# EAGLE board InkTime_pcb (EAGLE 9.7.0)
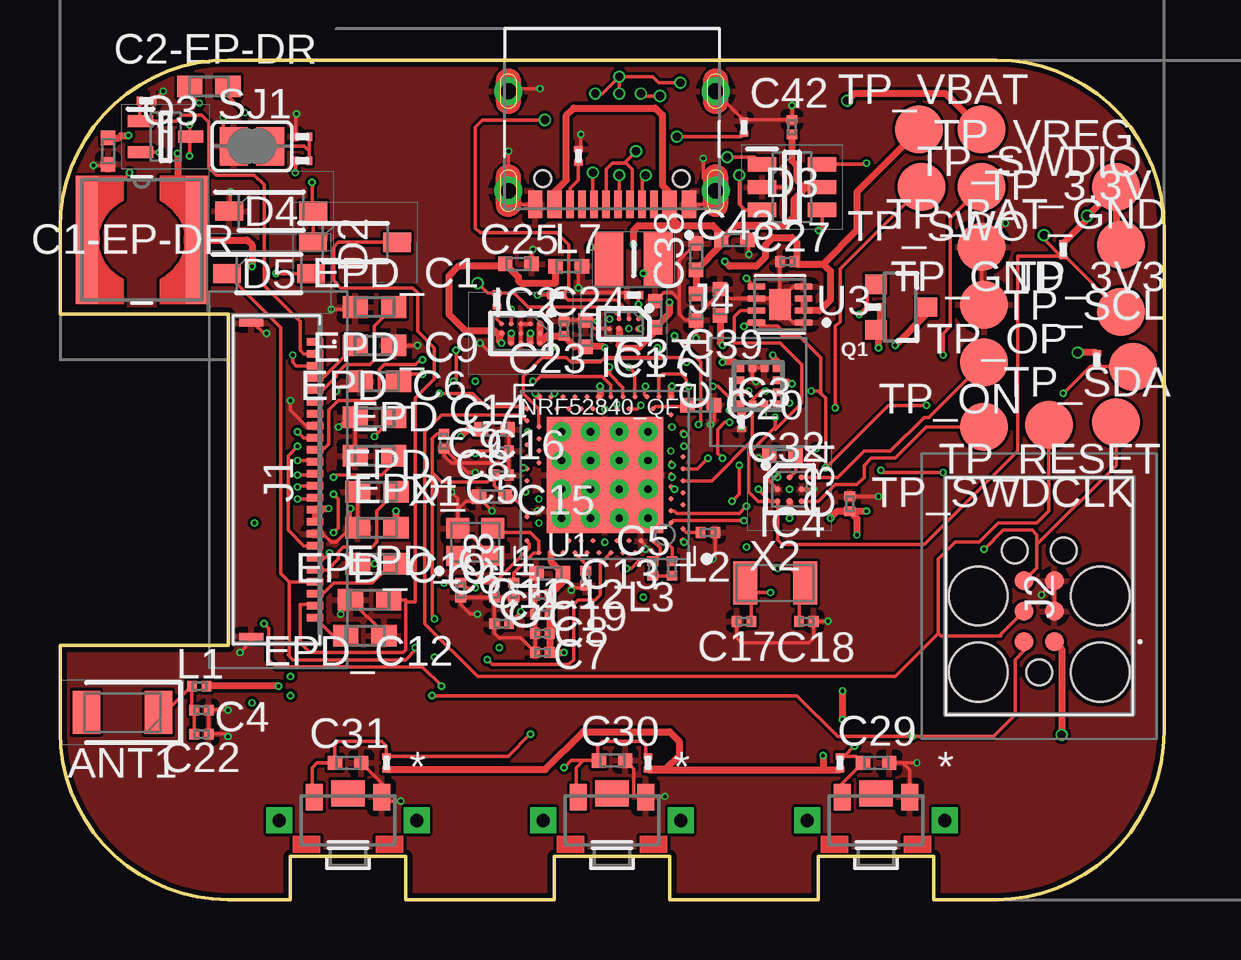
[diagram p0: board, top side]
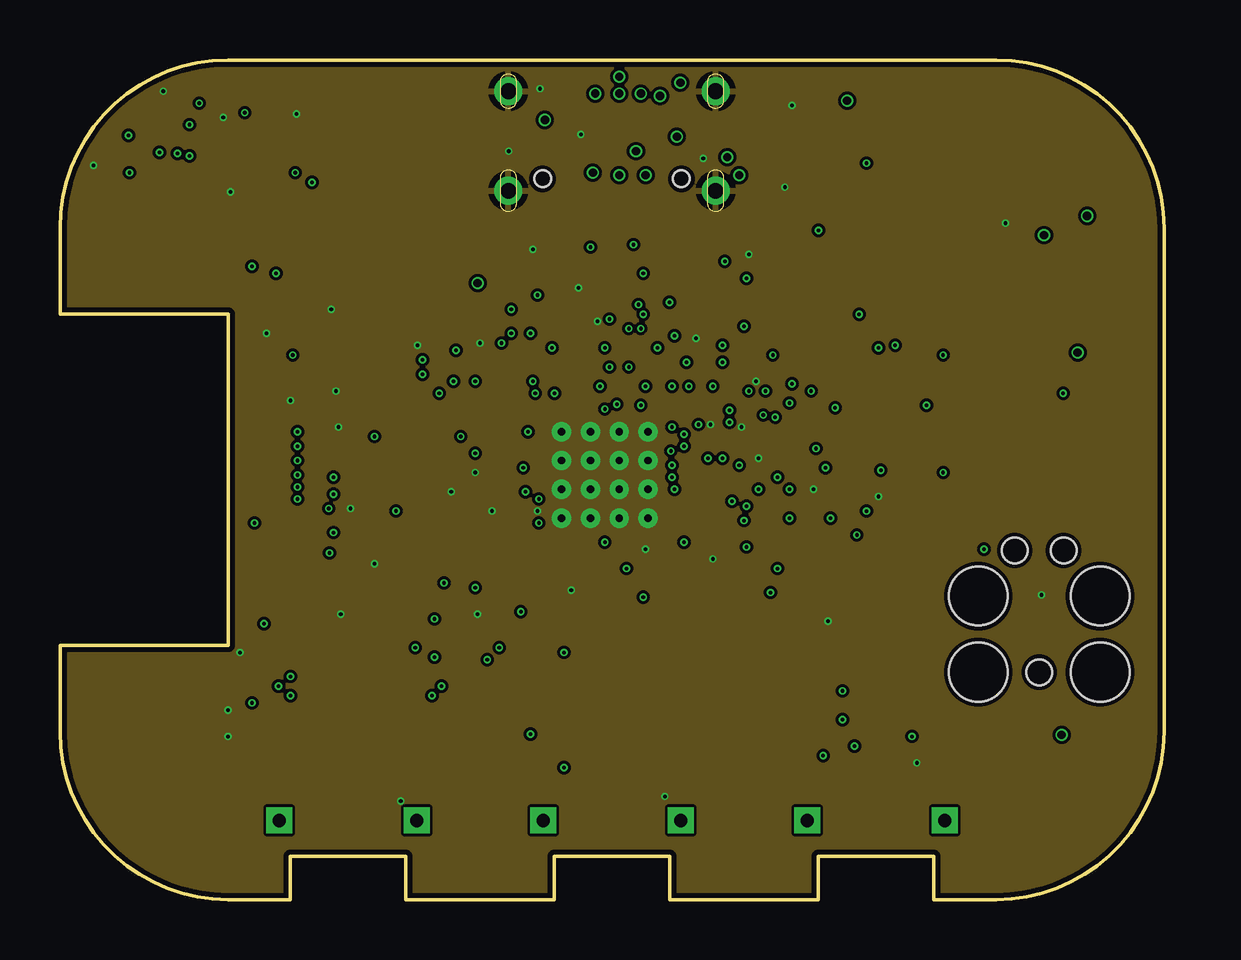
[diagram p1: board, inner layer Route2]
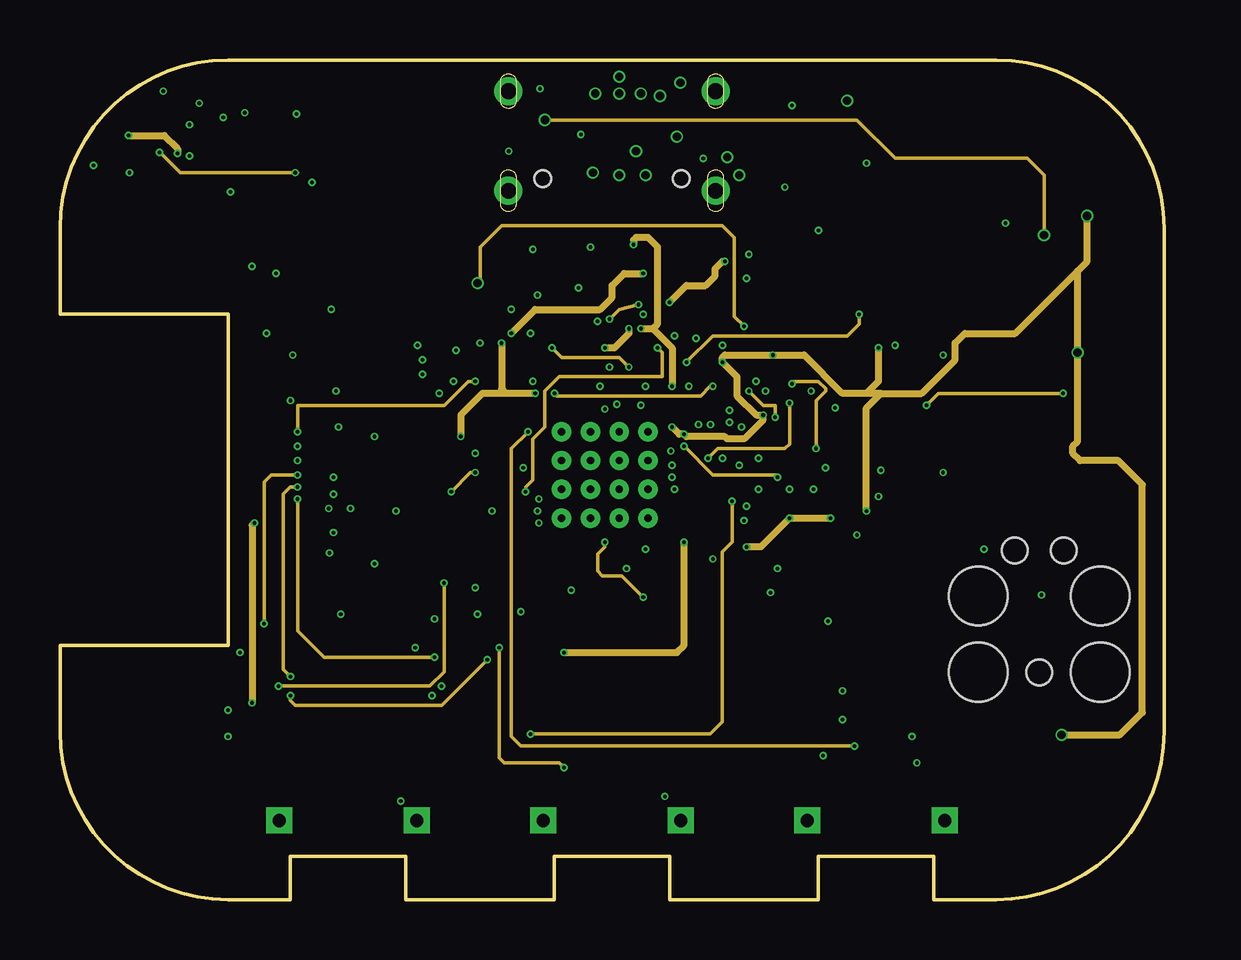
[diagram p2: board, inner layer Route15]
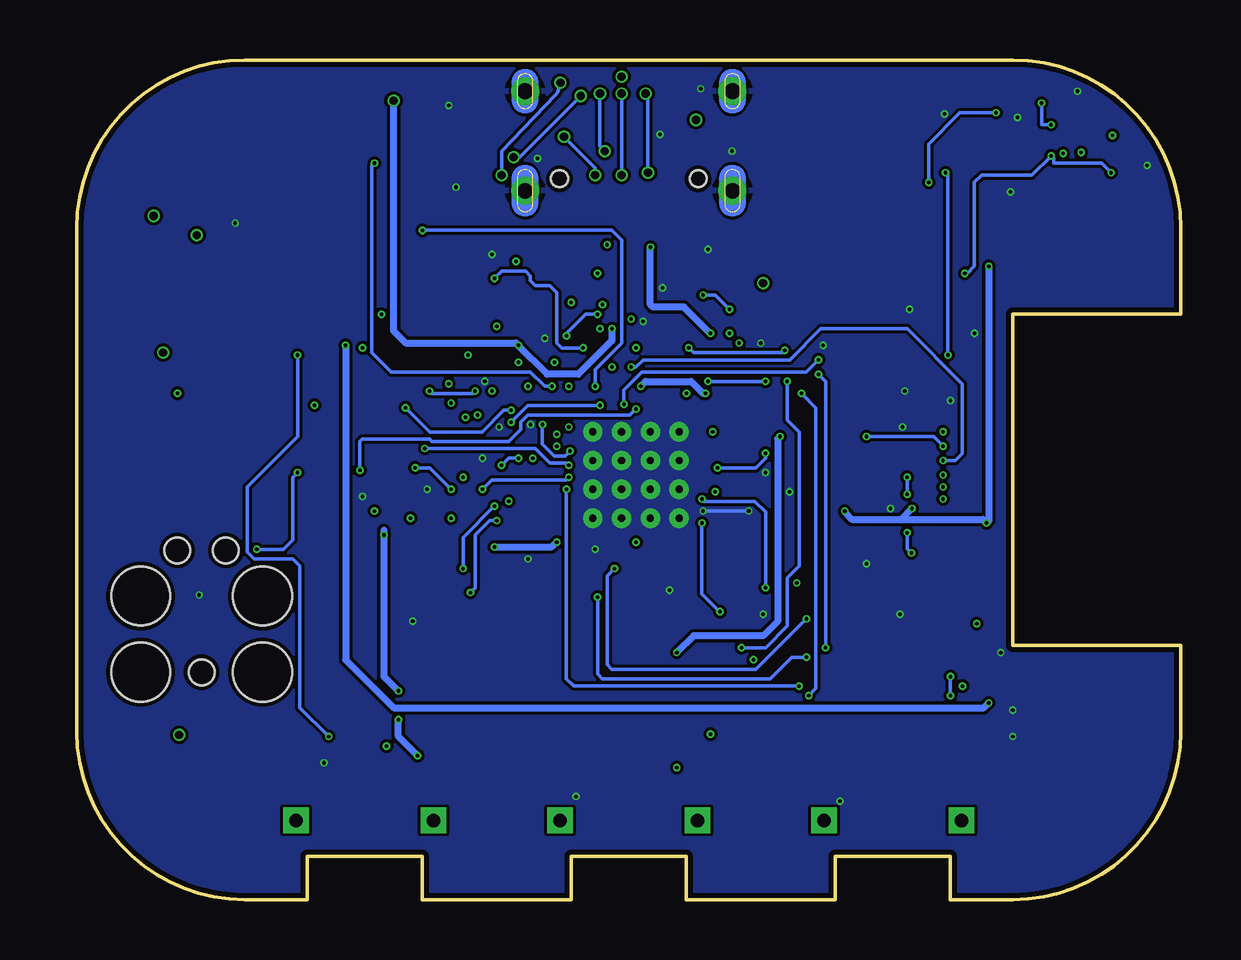
[diagram p3: board, bottom side, seen from below]

Size 46 x 35 mm. Coordinates in mm from the lower left corner, seen from the top.
Outline: 39,0 36.4,0 36.4,1.8 31.6,1.8 31.6,0 25.4,0 25.4,1.8 20.6,1.8 20.6,0 14.4,0 14.4,1.8 9.6,1.8 9.6,0 7,0 arc-90 0,7 0,10.6 7,10.6 7,24.4 0,24.4 0,28 arc-90 7,35 39,35 arc-90 46,28 46,7 arc-90 39,0
Copper layers (1+2*15+16): Top 0.035mm / dielectric 1.6mm / Route2 0.035mm / dielectric 0.15mm / Route15 0.035mm / dielectric 0.2mm / Bottom 0.035mm
Design rules "jlcpcb-2layers *": minimum track width 5mil, minimum drill 0.15mm, track to track 5mil, track to pad 5mil, pad to pad 5mil, via to via 5mil, smd to smd 5mil, copper to edge 0.2mm, drill to drill 6mil, minimum pad ring 10mil, minimum via ring 3mil, stop-mask expansion 4mil, vias tented up to drill 0mil, thermal gap 10mil

## Footprints (pad centres in the part's own frame; a part is rotated, then mirrored left to right if it is on the bottom)
2450AT18B100E_ANTC3216X140N = smd 1.15 x 1.8: 1 -1.5,0; 2 1.5,0
NORDIC_NRF_3_RESC0201_N = smd 0.4 x 0.45: 1 -0.305,0; 2 0.305,0
NORDIC_NRF_3_RESC0402_N = smd 0.6 x 0.6: 1 -0.55,0; 2 0.55,0
NORDIC_NRF_3_RESC0603_N = smd 1.05 x 0.9: 1 -0.8,0; 2 0.8,0
ESP32_C6_LIBRARY_5_SOD3716X135N = smd 1.15 x 0.8: 1 -1.75,0; 2 1.75,0
ESP32_C6_LIBRARY_3_SOT95P280X145-6N = smd 1.2 x 0.6: 1 -1.25,0.95; 2 -1.25,0; 3 -1.25,-0.95; 4 1.25,-0.95; 5 1.25,0; 6 1.25,0.95
BQ25180YBGR_BGA8C40P2X4_100X155X50 = smd 0.2 x 0.2: A1 -0.2,0.6; A2 0.2,0.6; B1 -0.2,0.2; B2 0.2,0.2; C1 -0.2,-0.2; C2 0.2,-0.2; D1 -0.2,-0.6; D2 0.2,-0.6
RT6160AWSC_BGA15C40P3X5_140X230X60 = smd 0.216 x 0.216: A1 -0.4,0.8; A2 0,0.8; A3 0.4,0.8; B1 -0.4,0.4; B2 0,0.4; B3 0.4,0.4; C1 -0.4,0; C2 0,0; C3 0.4,0; D1 -0.4,-0.4; D2 0,-0.4; D3 0.4,-0.4; E1 -0.4,-0.8; E2 0,-0.8; E3 0.4,-0.8
BMA423_BMA423 = smd 0.3 x 0.35: 1 -0.75,-0.775; 2 -0.25,-0.775; 3 0.25,-0.775; 4 0.75,-0.775; 7 0.75,0.775; 8 0.25,0.775; 9 -0.25,0.775; 10 -0.75,0.775 | smd 0.35 x 0.3: 5 0.775,-0.25; 6 0.775,0.25; 11 -0.775,0.25; 12 -0.775,-0.25
DRV2605YZFR_BGA9C50P3X3_144X144X62 = smd 0.25 x 0.25: A1 -0.5,0.5; A2 0,0.5; A3 0.5,0.5; B1 -0.5,0; B2 0,0; B3 0.5,0; C1 -0.5,-0.5; C2 0,-0.5; C3 0.5,-0.5
503480-2400_5034802400 = smd 0.3 x 0.7: 1 -5.75,1.525; 2 -5.25,1.525; 3 -4.75,1.525; 4 -4.25,1.525; 5 -3.75,1.525; 6 -3.25,1.525; 7 -2.75,1.525; 8 -2.25,1.525; 9 -1.75,1.525; 10 -1.25,1.525; 11 -0.75,1.525; 12 -0.25,1.525; 13 0.25,1.525; 14 0.75,1.525; 15 1.25,1.525; 16 1.75,1.525; 17 2.25,1.525; 18 2.75,1.525; 19 3.25,1.525; 20 3.75,1.525; 21 4.25,1.525; 22 4.75,1.525; 23 5.25,1.525; 24 5.75,1.525 | smd 0.3 x 1: MP1 -6.54,-1.125; MP2 6.54,-1.125
TC2030-IDC_TC2030IDC = smd 0.783 x 0.783: 1 -0.953,-0.635; 2 -0.953,0.635; 3 0.317,-0.635; 4 0.317,0.635; 5 1.588,-0.635; 6 1.588,0.635 | hole 2.451: -2.223,-2.54; -2.223,2.54; 0.952,-2.54; 0.952,2.54 | hole 1.067: -2.223,0; 2.857,-1.016; 2.857,1.016
KH-TYPE-C-16P_KINGHELM_KH-TYPE-C-16P = smd 0.6 x 1.15: A1_B12 -3.2,4.725; A4_B9 -2.4,4.725; A9_B4 2.4,4.725; A12_B1 3.2,4.725 | smd 0.3 x 1.15: A5 -1.25,4.725; A6 -0.25,4.725; A7 0.25,4.725; A8 1.25,4.725; B5 1.75,4.725; B6 0.75,4.725; B7 -0.75,4.725; B8 -1.75,4.725 | drill 0.65 pad 1.05: SH1 -4.32,0; SH2 4.32,0; SH3 -4.32,4.15; SH4 4.32,4.15 | hole 0.7: -2.89,3.65; 2.89,3.65
NORDIC_NRF_2_RESC0201_N = smd 0.4 x 0.45: 1 -0.305,0; 2 0.305,0
ESP32_C6_LIBRARY_2_IND_4828-WE-TPC_WRE = smd 0.9 x 5.3: 1 -2.286,0; 2 2.286,0
MLP2016SR47MT0S1_INDC2016X100N = smd 1.2 x 2.2: 1 -1.028,0; 2 1.028,0
ESP32_C6_LIBRARY_4_ESP32_C6_LIBRARY_4_ESP32_C6_LIBRARY_4_ESP32_C6_LIBRARY_4_ESP32_WROVER_SPARKFUN-DISCRETESEMI_SOT23-3 = smd 0.8 x 0.9: 1 -0.95,-1; 2 0.95,-1; 3 0,1.1
ESP32_C6_LIBRARY_6_SOT65P210X110-3N = smd 1.05 x 0.5: 1 -1.05,0.65; 2 -1.05,-0.65; 3 1.05,0
ERA-1AEB3401C_0201 = smd 0.35 x 0.25: 1 0,0.275; 2 0,-0.275
CPF0201D7K68C1_0201 = smd 0.35 x 0.25: 1 0,0.275; 2 0,-0.275
ESP32_C6_LIBRARY_7_JUMPER_SJ = smd 1.168 x 1.6: 1 -0.762,0; 2 0.762,0
2025-10-22_07-23-44_LIBRARY_SW_EVP-AKE31A_PAN = smd 0.711 x 1.092: 1 -1.4,-0.972; 2 1.4,-0.972 | drill 0.559 pad 0.914 square: 3 -2.864,0; 4 2.864,0 | smd 1.397 x 1.092: 5 0,-1.124
HECTOR_WATCH_1_TP20R = smd 2 x 2: TP 0,0
NORDIC_NRF_4_AQFN50P700X700X85_HS-74N = smd 4.85 x 4.85: P$74 0,0 | drill 0.3 pad 0.6: P$75 -1.8,1.8; P$76 -0.6,1.8; P$77 0.6,1.8; P$78 1.8,1.8; P$79 -1.8,0.6; P$80 -0.6,0.6; P$81 0.6,0.6; P$82 1.8,0.6; P$83 -1.8,-0.6; P$84 -0.6,-0.6; P$85 0.6,-0.6; P$86 1.8,-0.6; P$87 -1.8,-1.8; P$88 -0.6,-1.8; P$89 0.6,-1.8; P$90 1.8,-1.8 | smd 0.2 x 0.2: P$A8 -1.25,3.25; P$A10 -0.75,3.25; P$A12 -0.25,3.25; P$A14 0.25,3.25; P$A16 0.75,3.25; P$A18 1.25,3.25; P$A20 1.75,3.25; P$A22 2.25,3.25; P$A23 2.75,3.25; P$AA24 3.25,-2.25; P$AB2 -2.75,-2.5; P$AC5 -2,-2.75; P$AC9 -1,-2.75; P$AC11 -0.5,-2.75; P$AC13 0,-2.75; P$AC15 0.5,-2.75; P$AC17 1,-2.75; P$AC19 1.5,-2.75; P$AC21 2,-2.75; P$AC24 3.25,-2.75; P$AD2 -2.75,-3.25; P$AD4 -2.25,-3.25; P$AD6 -1.75,-3.25; P$AD8 -1.25,-3.25; P$AD10 -0.75,-3.25; P$AD12 -0.25,-3.25; P$AD14 0.25,-3.25; P$AD16 0.75,-3.25; P$AD18 1.25,-3.25; P$AD20 1.75,-3.25; P$AD22 2.25,-3.25; P$AD23 2.75,-3.25; P$B1 -3.25,2.75; P$B3 -2.5,2.75; P$B5 -2,2.75; P$B7 -1.5,2.75; P$B9 -1,2.75; P$B11 -0.5,2.75; P$B13 0,2.75; P$B15 0.5,2.75; P$B17 1,2.75; P$B19 1.5,2.75; P$B24 3.25,2.75; P$C1 -3.25,2.25; P$D2 -2.75,2; P$D23 2.75,2; P$E24 3.25,1.75; P$F2 -2.75,1.5; P$F23 2.75,1.5; P$G1 -3.25,1.25; P$H2 -2.75,1; P$H23 2.75,1; P$J1 -3.25,0.75; P$J24 3.25,0.75; P$K2 -2.75,0.5; P$L1 -3.25,0.25; P$L24 3.25,0.25; P$M2 -2.75,0; P$N1 -3.25,-0.25; P$N24 3.25,-0.25; P$P2 -2.75,-0.5; P$P23 2.75,-0.5; P$R1 -3.25,-0.75; P$R24 3.25,-0.75; P$T2 -2.75,-1; P$T23 2.75,-1; P$U1 -3.25,-1.25; P$U24 3.25,-1.25; P$V23 2.75,-1.5; P$W1 -3.25,-1.75; P$W24 3.25,-1.75; P$Y2 -2.75,-2; P$Y23 2.75,-2
ESP32_C6_LIBRARY_SON50P200X200X80-9N = smd 0.76 x 0.27: 1 -0.985,0.75; 2 -0.985,0.25; 3 -0.985,-0.25; 4 -0.985,-0.75; 5 0.985,-0.75; 6 0.985,-0.25; 7 0.985,0.25; 8 0.985,0.75 | smd 0.9 x 1.3: 9 0,0
NORDIC_NRF_BT-XTAL_2016_N = smd 0.95 x 0.85: 1 -0.725,-0.575; 2 0.725,-0.575; 3 0.725,0.575; 4 -0.725,0.575
NORDIC_NRF_1_XTAL_3215_N = smd 1 x 1.8: 1 -1.25,0; 2 1.25,0

## Placement (x,y rotation side)
ANT1  2450AT18B100E  [2450AT18B100E_ANTC3216X140N]  2.6,7.8 180 top
C1  12pF  [NORDIC_NRF_3_RESC0201_N]  18.1,12.9 270 top
C1-EP-DR  10uF  [NORDIC_NRF_3_RESC0402_N]  2,31.2 270 top
C2  12pF  [NORDIC_NRF_3_RESC0201_N]  18.9,12.9 270 top
C2-EP-DR  4.7uF/25  [NORDIC_NRF_3_RESC0603_N]  6.2,33.9 180 top
C3  1pF  [NORDIC_NRF_3_RESC0201_N]  16.7,12.9 90 top
C4  1pF  [NORDIC_NRF_3_RESC0201_N]  5.9,7.9 180 top
C5  100nF  [NORDIC_NRF_3_RESC0201_N]  27,15.3 0 top
C6  4.7uF  [NORDIC_NRF_3_RESC0402_N]  20.4,13.6 180 top
C7  100nF  [NORDIC_NRF_3_RESC0201_N]  20.1,10.3 180 top
C8  100nF  [NORDIC_NRF_3_RESC0201_N]  20.1,11.1 0 top
C9  820pF  [NORDIC_NRF_3_RESC0201_N]  18.4,18.7 180 top
C10  N.C.  [NORDIC_NRF_3_RESC0201_N]  16,19.1 90 top
C11  100pF  [NORDIC_NRF_3_RESC0201_N]  18.4,11.5 0 top
C12  100nF  [NORDIC_NRF_3_RESC0201_N]  20.1,12.7 180 top
C13  N.C.  [NORDIC_NRF_3_RESC0201_N]  21.9,13.4 270 top
C14  4.7uF  [NORDIC_NRF_3_RESC0402_N]  18.1,19.6 0 top
C15  1.0uF  [NORDIC_NRF_3_RESC0402_N]  18,16.8 180 top
C16  47nF  [NORDIC_NRF_3_RESC0201_N]  18.4,17.7 0 top
C17  12pF  [NORDIC_NRF_3_RESC0201_N]  28.5,11.6 0 top
C18  12pF  [NORDIC_NRF_3_RESC0201_N]  31.1,11.6 180 top
C19  100nF  [NORDIC_NRF_3_RESC0201_N]  20.1,11.9 180 top
C20  4.7uF  [NORDIC_NRF_3_RESC0402_N]  26.7,20.6 0 top
C21  4.7uF  [NORDIC_NRF_3_RESC0402_N]  26.5,24.7 270 top
C22  N.C.  [NORDIC_NRF_3_RESC0201_N]  5.9,6.9 0 top
C23  0.1uF  [NORDIC_NRF_3_RESC0201_N]  21,23.8 270 top
C24  10uF  [NORDIC_NRF_3_RESC0402_N]  21.9,23.6 270 top
C25  22uF  [NORDIC_NRF_3_RESC0402_N]  19.1,26.5 0 top
C27  0.1uF  [NORDIC_NRF_3_RESC0201_N]  30.3,26.6 180 top
C29  1uF  [NORDIC_NRF_3_RESC0402_N]  34,5.7 0 top
C30  1uF  [NORDIC_NRF_3_RESC0402_N]  23,5.8 0 top
C31  1uF  [NORDIC_NRF_3_RESC0402_N]  12,5.7 0 top
C32  1uF  [NORDIC_NRF_3_RESC0402_N]  30.1,18.5 180 top
C33  22uF  [NORDIC_NRF_3_RESC0402_N]  21.2,26.4 0 top
C34  0.1uF  [NORDIC_NRF_3_RESC0201_N]  32.9,16.5 90 top
C37  1uF  [NORDIC_NRF_3_RESC0402_N]  24.8,24.4 90 top
C38  1uF  [NORDIC_NRF_3_RESC0402_N]  26.5,26.8 90 top
C39  10uF  [NORDIC_NRF_3_RESC0402_N]  27.5,24.9 90 top
C42  0.1uF  [NORDIC_NRF_3_RESC0201_N]  30.5,32.2 90 top
C43  4.7uF  [NORDIC_NRF_3_RESC0402_N]  28.1,27.5 0 top
D2  MBR0530  [ESP32_C6_LIBRARY_5_SOD3716X135N]  12.3,27.4 359.9 top
D3  USBLC6-2SC6Y  [ESP32_C6_LIBRARY_3_SOT95P280X145-6N]  30.5,29.7 0 top
D4  MBR0530  [ESP32_C6_LIBRARY_5_SOD3716X135N]  8.8,28.7 0 top
D5  MBR0530  [ESP32_C6_LIBRARY_5_SOD3716X135N]  8.7,26.1 0 top
EPD_C1  1uF/50V  [NORDIC_NRF_3_RESC0603_N]  13.1,24.7 0 top
EPD_C2  1uF/50V  [NORDIC_NRF_3_RESC0603_N]  13.1,23.1 180 top
EPD_C5  1uF/50V  [NORDIC_NRF_3_RESC0603_N]  13.2,15.5 0 top
EPD_C6  1uF/50V  [NORDIC_NRF_3_RESC0603_N]  13.1,20.1 0 top
EPD_C7  1uF/50V  [NORDIC_NRF_3_RESC0603_N]  13.1,18.5 0 top
EPD_C8  1uF/50V  [NORDIC_NRF_3_RESC0603_N]  13.2,17 0 top
EPD_C9  1uF/50V  [NORDIC_NRF_3_RESC0603_N]  13.3,21.6 0 top
EPD_C10  1uF/50V  [NORDIC_NRF_3_RESC0603_N]  13.2,14 0 top
EPD_C11  1uF/50V  [NORDIC_NRF_3_RESC0603_N]  12.9,12.5 0 top
EPD_C12  1uF/50V  [NORDIC_NRF_3_RESC0603_N]  12.7,11 180 top
IC1  BQ25180YBGR  [BQ25180YBGR_BGA8C40P2X4_100X155X50]  23.5,24 270 top
IC2  RT6160AWSC  [RT6160AWSC_BGA15C40P3X5_140X230X60]  19.2,23.6 270 top
IC3  BMA423  [BMA423_BMA423]  29.1,21.4 0 top
IC4  DRV2605YZFR  [DRV2605YZFR_BGA9C50P3X3_144X144X62]  30.4,17.1 0 top
J1  503480-2400  [503480-2400_5034802400]  9.1,17.5 270 top
J2  TC2030-IDC  [TC2030-IDC_TC2030IDC]  40.8,11.7 90 top
J4  KH-TYPE-C-16P  [KH-TYPE-C-16P_KINGHELM_KH-TYPE-C-16P]  23,33.7 180 top
L1  3.9nH  [NORDIC_NRF_2_RESC0201_N]  5.8,8.9 180 top
L2  10uH  [NORDIC_NRF_2_RESC0201_N]  25.5,13.8 270 top
L3  15nH  [NORDIC_NRF_2_RESC0201_N]  24.7,13.8 90 top
L5  68uH  [ESP32_C6_LIBRARY_2_IND_4828-WE-TPC_WRE]  3.4,27.5 0 top
L7  FTC252012SR47MBCA  [MLP2016SR47MT0S1_INDC2016X100N]  23.9,26.7 0 top
Q1  20V/4.2A/52mΩ/1.4W  [ESP32_C6_LIBRARY_4_ESP32_C6_LIBRARY_4_ESP32_C6_LIBRARY_4_ESP32_C6_LIBRARY_4_ESP32_WROVER_SPARKFUN-DISCRETESEMI_SOT23-3]  35,24.7 270 top
Q3  SI1308EDL-T1-GE3  [ESP32_C6_LIBRARY_6_SOT65P210X110-3N]  4.4,31.8 0 top
R1_EP_DR  0.47  [ERA-1AEB3401C_0201]  10.1,30.8 270 top
R1_USB  5K1  [CPF0201D7K68C1_0201]  28.5,32.2 0 top
R2  0  [CPF0201D7K68C1_0201]  18.2,25 0 top
R2_EP_DR  10K  [ERA-1AEB3401C_0201]  3.6,33.3 270 top
R2_USB  5K1  [CPF0201D7K68C1_0201]  21.6,31 180 top
R3  0  [ERA-1AEB3401C_0201]  28.4,19.9 180 top
R4  0  [CPF0201D7K68C1_0201]  20.7,25.2 270 top
R5  10K  [ERA-1AEB3401C_0201]  24.5,5.7 0 top
R7  10K  [ERA-1AEB3401C_0201]  32.5,5.7 0 top
R8  10K  [ERA-1AEB3401C_0201]  13.6,5.7 0 top
R9  10K  [CPF0201D7K68C1_0201]  23.9,25.2 90 top
R17  3K3  [CPF0201D7K68C1_0201]  41.8,27.1 0 top
R18  3K3  [CPF0201D7K68C1_0201]  43.2,22.5 0 top
R_PWR_EPD  10K  [CPF0201D7K68C1_0201]  33.9,24.7 90 top
R_TYPE_SEL  2.2  [ERA-1AEB3401C_0201]  10.1,31.8 90 top
SJ1  SJ  [ESP32_C6_LIBRARY_7_JUMPER_SJ]  8,31.4 0 top
SW_DN  SW_DN  [2025-10-22_07-23-44_LIBRARY_SW_EVP-AKE31A_PAN]  34,3.3 180 top
SW_ENT  SW_ENT  [2025-10-22_07-23-44_LIBRARY_SW_EVP-AKE31A_PAN]  12,3.3 180 top
SW_UP  SW_UP  [2025-10-22_07-23-44_LIBRARY_SW_EVP-AKE31A_PAN]  23,3.3 180 top
TP_3.3V  HECTOR_WATCH_1_TPTP20R  [HECTOR_WATCH_1_TP20R]  44,29.7 0 top
TP_3V3  HECTOR_WATCH_1_TPTP20R  [HECTOR_WATCH_1_TP20R]  44.2,27.3 0 top
TP_BAT_GND  HECTOR_WATCH_1_TPTP20R  [HECTOR_WATCH_1_TP20R]  38.4,27.2 0 top
TP_GND  HECTOR_WATCH_1_TPTP20R  [HECTOR_WATCH_1_TP20R]  38.5,24.8 0 top
TP_ON  HECTOR_WATCH_1_TPTP20R  [HECTOR_WATCH_1_TP20R]  38.5,19.7 0 top
TP_OP  HECTOR_WATCH_1_TPTP20R  [HECTOR_WATCH_1_TP20R]  38.5,22.4 0 top
TP_RESET  HECTOR_WATCH_1_TPTP20R  [HECTOR_WATCH_1_TP20R]  44,19.9 0 top
TP_SCL  HECTOR_WATCH_1_TPTP20R  [HECTOR_WATCH_1_TP20R]  44.2,24.5 0 top
TP_SDA  HECTOR_WATCH_1_TPTP20R  [HECTOR_WATCH_1_TP20R]  44.7,22.2 0 top
TP_SWDCLK  HECTOR_WATCH_1_TPTP20R  [HECTOR_WATCH_1_TP20R]  41.2,19.8 0 top
TP_SWDIO  HECTOR_WATCH_1_TPTP20R  [HECTOR_WATCH_1_TP20R]  38.4,29.7 0 top
TP_SWO  HECTOR_WATCH_1_TPTP20R  [HECTOR_WATCH_1_TP20R]  35.9,29.7 0 top
TP_VBAT  HECTOR_WATCH_1_TPTP20R  [HECTOR_WATCH_1_TP20R]  35.8,32.1 0 top
TP_VREG  HECTOR_WATCH_1_TPTP20R  [HECTOR_WATCH_1_TP20R]  38.4,32.1 0 top
U1  NRF52840_QF  [NORDIC_NRF_4_AQFN50P700X700X85_HS-74N]  22.7,17.7 180 top
U3  MAX17048G+T10  [ESP32_C6_LIBRARY_SON50P200X200X80-9N]  30,24.8 180 top
X1  32MHz  [NORDIC_NRF_BT-XTAL_2016_N]  17.3,14.9 0 top
X2  32.768kHz  [NORDIC_NRF_1_XTAL_3215_N]  29.8,13.2 0 top

## Library data of the parts
ANT1 = InkTime_v5; ARROW_PART_NUMBER: 2450AT18B100E; ARROW_PRICE-STOCK: https://www.arrow.com/en/products/2450at18b100e/johanson-dielectrics?utm_currency=USD&region=nac; DESCRIPTION: Antennas 2.45GHz ANTENNA; HEIGHT: 1.4mm; MANUFACTURER_NAME: JOHANSON TECHNOLOGY; MANUFACTURER_PART_NUMBER: 2450AT18B100E; MOUSER_PART_NUMBER: 609-2450AT18B100E; MOUSER_PRICE-STOCK: https://www.mouser.co.uk/ProductDetail/Johanson-Technology/2450AT18B100E?qs=yCnrNFeXz%252Bh5MFsFIXGZGA%3D%3D
C1 C1-EP-DR C2 C2-EP-DR C3-C25 C27 C29-C34 C37-C39 C42 C43 EPD_C1 EPD_C2 EPD_C5-EPD_C12 L1-L3 R1_EP_DR R1_USB R2 R2_EP_DR R2_USB R3-R5 R7-R9 R17 R18 R_PWR_EPD R_TYPE_SEL SJ1 TP_3.3V TP_3V3 TP_BAT_GND TP_GND TP_ON TP_OP TP_RESET TP_SCL TP_SDA TP_SWDCLK TP_SWDIO TP_SWO TP_VBAT TP_VREG U1 X1 X2 = InkTime_v5
D2 D4 D5 = InkTime_v5; AVAILABILITY: In Stock; CHECK_PRICES: https://www.snapeda.com/parts/MBR0530/Onsemi/view-part/?ref=eda; DESCRIPTION: Diode Schottky 30 V 500mA Surface Mount SOD-123; MF: ON Semiconductor; MP: MBR0530; PACKAGE: SOD-123-2 ON Semiconductor; PRICE: None; PURCHASE-URL: https://www.snapeda.com/api/url_track_click_mouser/?unipart_id=179458&manufacturer=ON Semiconductor&part_name=MBR0530&search_term=None; SNAPEDA_LINK: https://www.snapeda.com/parts/MBR0530/Onsemi/view-part/?ref=snap
D3 = InkTime_v5; AVAILABILITY: In Stock; CHECK_PRICES: https://www.snapeda.com/parts/USBLC6-2SC6Y/STMicroelectronics/view-part/?ref=eda; DESCRIPTION: 17V Clamp 5A (8/20µs) Ipp Tvs Diode Surface Mount SOT-23-6; MF: STMicroelectronics; MP: USBLC6-2SC6Y; PACKAGE: SOT-23-6 STMicroelectronics; PRICE: None; SNAPEDA_LINK: https://www.snapeda.com/parts/USBLC6-2SC6Y/STMicroelectronics/view-part/?ref=snap
IC1 = InkTime_v5; ARROW_PART_NUMBER: BQ25180YBGR; ARROW_PRICE-STOCK: https://www.arrow.com/en/products/bq25180ybgr/texas-instruments?utm_currency=USD&region=nac; DESCRIPTION: Charger IC Lithium Ion/Polymer, Lithium Iron Phosphate 8-DSBGA (1.6x1.1); HEIGHT: 0.5mm; MANUFACTURER_NAME: Texas Instruments; MANUFACTURER_PART_NUMBER: BQ25180YBGR; MOUSER_PART_NUMBER: 595-BQ25180YBGR; MOUSER_PRICE-STOCK: https://www.mouser.co.uk/ProductDetail/Texas-Instruments/BQ25180YBGR?qs=doiCPypUmgEWjAK%252BJAX6Tw%3D%3D
IC2 = InkTime_v5; DESCRIPTION: Buck-Boost Regulator Positive Output Step-Up/Step-Down I2C DC-DC Controller IC 15-WL-CSP (BSC) (1.4x2.3); HEIGHT: 0.6mm; MANUFACTURER_NAME: RICHTEK; MANUFACTURER_PART_NUMBER: RT6160AWSC; MOUSER_PART_NUMBER: 835-RT6160AWSC; MOUSER_PRICE-STOCK: https://www.mouser.co.uk/ProductDetail/Richtek/RT6160AWSC?qs=amGC7iS6iy%2FLd9PSoixZXQ%3D%3D
IC3 = InkTime_v5; ARROW_PART_NUMBER: BMA423; ARROW_PRICE-STOCK: https://www.arrow.com/en/products/bma423/bosch; DESCRIPTION: Accelerometers Triaxial low-g 12bit Acceleration Sensor; HEIGHT: 1mm; MANUFACTURER_NAME: BOSCH; MANUFACTURER_PART_NUMBER: BMA423; MOUSER_PART_NUMBER: 262-BMA423; MOUSER_PRICE-STOCK: https://www.mouser.co.uk/ProductDetail/Bosch-Sensortec/BMA423?qs=HXFqYaX1Q2xC%252BSgeGoX3mg%3D%3D
IC4 = InkTime_v5; ARROW_PART_NUMBER: DRV2605YZFR; ARROW_PRICE-STOCK: https://www.arrow.com/en/products/drv2605yzfr/texas-instruments?region=nac; DESCRIPTION: Haptic Driver for ERM/LRA with Built-In Library and Smart Loop Architecture; HEIGHT: 0.625mm; MANUFACTURER_NAME: Texas Instruments; MANUFACTURER_PART_NUMBER: DRV2605YZFR
J1 = InkTime_v5; DESCRIPTION: FFC & FPC Connectors 0.5mm FPC RA SMT Dual Contact 24Ckt; HEIGHT: 1.87mm; MANUFACTURER_NAME: Molex; MANUFACTURER_PART_NUMBER: 503480-2400; MOUSER_PART_NUMBER: 538-503480-2400; MOUSER_PRICE-STOCK: https://www.mouser.co.uk/ProductDetail/Molex/503480-2400?qs=OAhjpuo3Vu7efIoxFh9AOw%3D%3D
J2 = InkTime_v5; DESCRIPTION: CABLE ADAPTER 6 POS; HEIGHT: 19mm; MANUFACTURER_NAME: Tag Connect; MANUFACTURER_PART_NUMBER: TC2030-IDC
J4 = InkTime_v5; AVAILABILITY: Not in stock; CHECK_PRICES: https://www.snapeda.com/parts/KH-TYPE-C-16P/Kinghelm/view-part/?ref=eda; MF: kinghelm; MP: KH-TYPE-C-16P; PACKAGE: None; PRICE: None; SNAPEDA_LINK: https://www.snapeda.com/parts/KH-TYPE-C-16P/Kinghelm/view-part/?ref=snap
L5 = InkTime_v5; COPYRIGHT: Copyright (C) 2024 Ultra Librarian. All rights reserved.; MANUFACTURER_PART_NUMBER: 744043680; MFR_NAME: Wurth Electronics
L7 = InkTime_v5; DESCRIPTION: SMD / SMT Inductors (Coils), L=0.47?H, L x W x T :; HEIGHT: 1mm; JLCPCB: https://jlcpcb.com/partdetail/6763488-FTC252012SR47MBCA/C5832368; MANUFACTURER_NAME: TDK; MANUFACTURER_PART_NUMBER: FTC252012SR47MBCA
Q1 = InkTime_v5; PROD_ID: TRAN-14388
Q3 = InkTime_v5; AVAILABILITY: In Stock; CHECK_PRICES: https://www.snapeda.com/parts/SI1308EDL-T1-GE3/Vishay+Siliconix/view-part/?ref=eda; DESCRIPTION: Si1308EDL-T1-GE3 N-channel MOSFET Transistor, 1.5 A, 30 V, 3-Pin SC-70 | Siliconix / Vishay SI1308EDL-T1-GE3; MF: Vishay Siliconix; MP: SI1308EDL-T1-GE3; PACKAGE: SOT-323 Vishay Semiconductor; PRICE: None; PURCHASE-URL: https://www.snapeda.com/api/url_track_click_mouser/?unipart_id=274603&manufacturer=Vishay Siliconix&part_name=SI1308EDL-T1-GE3&search_term=None; SNAPEDA_LINK: https://www.snapeda.com/parts/SI1308EDL-T1-GE3/Vishay+Siliconix/view-part/?ref=snap
SW_DN SW_ENT SW_UP = InkTime_v5; COPYRIGHT: Copyright (C) 2025 Ultra Librarian. All rights reserved.; DIGI-KEY_PART_NUMBER_1: P123437TR-ND; DIGI-KEY_PART_NUMBER_2: P123437CT-ND; DIGI-KEY_PART_NUMBER_3: P123437DKR-ND; MANUFACTURER_NAME: Panasonic; MANUFACTURER_PART_NUMBER: EVP-AKE31A
U3 = InkTime_v5; AVAILABILITY: In Stock; CHECK_PRICES: https://www.snapeda.com/parts/MAX17048G+T10/Analog+Devices/view-part/?ref=eda; DESCRIPTION: 3µA 1-Cell/2-Cell Fuel Gauge with ModelGauge; MF: Analog Devices; MP: MAX17048G+T10; PACKAGE: TDFN-8 Maxim; PRICE: None; PURCHASE-URL: https://www.snapeda.com/api/url_track_click_mouser/?unipart_id=329239&manufacturer=Analog Devices&part_name=MAX17048G+T10&search_term=None; SNAPEDA_LINK: https://www.snapeda.com/parts/MAX17048G+T10/Analog+Devices/view-part/?ref=snap

## Nets
3V3: C6.1 C7.1 C8.2 C12.1 C14.1 C19.1 C25.1 C33.1 C34.1 IC2.E2 IC2.E3 IC3.3 IC3.7 IC3.10 IC4.C2 J2.1 Q1.2 R5.2 R7.2 R8.2 R17.1 R18.1 R_PWR_EPD.2 TP_3.3V.TP TP_3V3.TP U1.P$A22 U1.P$AD14 U1.P$AD23 U1.P$B1 U1.P$W1 U1.P$Y2
ALERT: U1.P$J24 U3.5
D+: D3.4 U1.P$AD6
D-: D3.6 U1.P$AD4
DEC1: C5.1 U1.P$C1
DEC3: C11.2 U1.P$D23
DEC4_6: C10.2 C15.1 C16.1 L3.2 U1.P$B5 U1.P$E24
DN: D3.1 J4.A7 J4.B7
DP: D3.3 J4.A6 J4.B6
EPD_3V3: C1-EP-DR.1 EPD_C5.2 J1.15 J1.16 L5.2 Q1.3
EPD_BUSY: J1.9 U1.P$AD12
EPD_CS: J1.12 U1.P$K2
EPD_DC: J1.11 U1.P$AD10
EPD_RST: J1.10 U1.P$AC11
GDR: J1.2 Q3.1 R2_EP_DR.2
GND: C1-EP-DR.2 C1.2 C2.2 C3.1 C4.1 C5.2 C6.2 C7.2 C8.1 C9.1 C10.1 C11.1 C12.2 C13.2 C14.2 C15.2 C16.2 C17.1 C18.1 C19.2 C20.2 C21.2 C22.2 C23.1 C24.1 C25.2 C27.2 C29.2 C30.2 C31.2 C32.2 C33.2 C34.2 C37.2 C38.2 C39.2 C42.2 C43.2 D3.2 D4.1 EPD_C1.1 EPD_C2.1 EPD_C5.1 EPD_C6.1 EPD_C7.1 EPD_C8.1 EPD_C9.1 EPD_C10.1 EPD_C11.1 EPD_C12.1 IC1.D2 IC2.B1 IC2.C1 IC2.C2 IC2.C3 IC3.8 IC3.9 IC4.B1 IC4.B3 J1.8 J1.17 J1.MP1 J1.MP2 J2.3 J2.5 J4.A1_B12 J4.A12_B1 J4.SH1 J4.SH2 J4.SH3 J4.SH4 R1_USB.1 R2_EP_DR.1 R2_USB.2 R3.1 R9.1 R_TYPE_SEL.1 SJ1.1 SW_DN.1 SW_ENT.1 SW_UP.1 TP_BAT_GND.TP TP_GND.TP U1.P$74 U1.P$75 U1.P$76 U1.P$77 U1.P$78 U1.P$79 U1.P$80 U1.P$81 U1.P$82 U1.P$83 U1.P$84 U1.P$85 U1.P$86 U1.P$87 U1.P$88 U1.P$89 U1.P$90 U1.P$B7 U1.P$F23 U3.1 U3.4 U3.6 U3.9 X1.2 X1.4
HAPTIC_EN: IC4.A1 U1.P$U1
IMU_INT1: IC3.5 U1.P$N1
IMU_INT2: IC3.6 U1.P$P2
LX1: IC2.B2 IC2.B3 L7.1
LX2: IC2.D2 IC2.D3 L7.2
MOSI: J1.14 U1.P$B13
N$1: C1.1 U1.P$B24 X1.1
N$3: C2.1 U1.P$A23 X1.3
N$4: C3.2 L1.1 U1.P$H23
N$5: C9.2 U1.P$N24
N$6: C13.1 U1.P$A18
N$7: IC2.D1 R4.2
N$8: L2.1 U1.P$B3
N$9: L2.2 L3.1
N$10: C20.1 U1.P$AC5
N$11: EPD_C2.2 J1.4
N$12: IC1.D1 R9.2
N$14: IC2.E1 R2.2
N$15: C32.1 IC4.A2
N$16: R1_EP_DR.1 R_TYPE_SEL.2 SJ1.2
N$18: IC3.1 R3.2
N$19: C2-EP-DR.1 D2.1 D4.2
N$21: C2-EP-DR.2 D5.2 L5.1 Q3.3
N$22: EPD_C1.2 J1.5
N$23: J4.B5 R2_USB.1
N$28: J4.A5 R1_USB.2
N$32: EPD_C6.2 J1.18
N$33: EPD_C7.2 J1.19
N$34: EPD_C8.2 J1.20
N$37: EPD_C10.2 J1.22
N$38: EPD_C12.2 J1.24
OUT+: IC4.A3 TP_OP.TP
OUT-: IC4.C3 TP_ON.TP
P0.00/XL1: C17.2 U1.P$D2 X2.1
P0.01/XL2: C18.2 U1.P$F2 X2.2
P0.04: U1.P$J1
P0.09: U1.P$L24
P0.13: C30.1 R5.1 SW_UP.2 U1.P$AD8
P0.14: C31.1 R8.1 SW_ENT.2 U1.P$AC9
P0.19: U1.P$AC15
P0.20: U1.P$AD16
P0.21: U1.P$AC17
P0.22: U1.P$AD18
P0.23: U1.P$AC19
P0.24: U1.P$AD20
P0.25: U1.P$AC21
P0.26: U1.P$G1
P0.27: U1.P$H2
P0.28: U1.P$B11
P0.29: U1.P$A10
P0.30: U1.P$B9
P0.31: U1.P$A8
P1.01: Q1.1 R_PWR_EPD.1 U1.P$Y23
P1.02: C29.1 R7.1 SW_DN.2 U1.P$W24
P1.03: U1.P$V23
P1.04: U1.P$U24
P1.05: U1.P$T23
P1.06: U1.P$R24
P1.07: U1.P$P23
P1.09: U1.P$R1
P1.10: U1.P$A20
P1.11: U1.P$B19
P1.12: U1.P$B17
P1.13: U1.P$A16
P1.14: U1.P$B15
P1.15: U1.P$A14
PMIC_INT: IC1.A1 U1.P$T2
PREVGH: D5.1 EPD_C9.2 J1.21
PREVGL: D2.2 EPD_C11.2 J1.23
RESE: J1.3 Q3.2 R1_EP_DR.2
RESET: J2.6 TP_RESET.TP U1.P$AC13
RF: ANT1.1 C4.2 C22.1 L1.2
SCK: J1.13 U1.P$A12
SCL: IC1.B1 IC3.12 IC4.C1 R4.1 R17.2 TP_SCL.TP U1.P$M2 U3.7
SDA: IC1.C1 IC3.2 IC4.B2 R2.1 R18.2 TP_SDA.TP U1.P$L1 U3.8
SWDCLK: J2.4 TP_SWDCLK.TP U1.P$AA24
SWDIO: J2.2 TP_SWDIO.TP U1.P$AC24
SWO: TP_SWO.TP U1.P$AD22
VBAT: C27.1 C37.1 IC1.C2 TP_VBAT.TP U3.2 U3.3
VBUS: C21.1 C38.1 C42.1 C43.1 D3.5 IC1.A2 J4.A4_B9 J4.A9_B4 U1.P$AD2
VREG: C23.2 C24.2 C39.1 IC1.B2 IC2.A1 IC2.A2 IC2.A3 TP_VREG.TP

## Tracks (layer width: path | path; a pad name or v marks a point on that pad's centre or on a via)
3V3  (via drill 0.15, 0.15 pad 0.3, 0.35, 0.35 pad 0.3)
  Top 0.3: C33.1 20.65,25.7 19.2,25.7 19.1,25.8 19.1,25.95 C25.1 18.45,26.4 16.6,26.4 16.2,26 16.2,24.4 16.9,23.7 18.1,23.7 18.2,23.6 IC2.E2 18.3,23.5 18.3,23.3 IC2.E3 | R8.2 20.23,5.43 21.8,7 25.4,7 25.8,6.6 25.8,6 25.23,5.43 R5.2 24.52,5.4 31.9,5.4 | C34.1 v33.6,16.2 | v32.6,8.7 v32.6,7.5 | C34.1 33.2,15.89 v33.2,15.2 | J2.1 41.73,10.45 v41.73,6.87 | v27.6,22.4 28.12,22.4 IC3.10 | v29.7,22.7 29.7,22.62 29.85,22.48 IC3.7 | C8.2 20.41,11.17 | v21,10.3 C7.1 C8.2 | C14.1 17,19.6 v16.7,19.3 | IC4.C2 v30.4,15.9 | v32.1,15.9 32.39,16.2 C34.1 | U1.P$AD23 v19.8,21.1 | U1.P$Y2 v25.5,19.7 | U1.P$W1 v26,19.4 | IC3.3 29.3,20.57 v29.3,20.2 | R18.1 43.17,22.8 v42.4,22.8 | v31.8,6 31.8,5.5 31.9,5.4 | 31.9,5.4 32.48,5.4 R7.2 | v34.1,23 34.1,23.65 Q1.2 34.17,23.93 R_PWR_EPD.2 | C8.2 C19.1 C12.1 20.95,13.25 C6.1 20.45,14.1 U1.P$A22 | U1.P$B1 v26,14.9 | R17.1 42.8,28.38 v42.8,28.5 TP_3.3V.TP 44,27.5 TP_3V3.TP | v22.5,21.4 22.5,21 U1.P$AD14
  Route15 0.3: 34.2,21.1 33.6,21.1 | 33.6,21.1 32.6,21.1 31,22.7 v29.7,22.7 27.7,22.7 27.6,22.6 v27.6,22.4 28.2,21.8 28.2,21 29,20.2 v29.3,20.2 29.3,20 28.5,19.2 27.8,19.2 27.7,19.3 26.1,19.3 v26,19.4 25.8,19.4 v25.5,19.7 | v21,10.3 25.7,10.3 26,10.6 v26,14.9 | IC2.E3 18.4,21.3 18.6,21.1 v19.8,21.1 17.6,21.1 16.7,20.2 v16.7,19.3 | v32.1,15.9 v30.4,15.9 29.2,14.7 v28.6,14.7 | v33.6,16.2 33.6,20.5 34.2,21.1 | 34.2,21.1 35.9,21.1 37.3,22.5 37.3,23.2 37.7,23.6 39.8,23.6 42.4,26.2 | v42.8,28.5 42.8,26.6 42.4,26.2 | v41.73,6.87 44.16,6.87 45.1,7.8 45.1,17.3 44.1,18.3 42.5,18.3 42.2,18.6 42.2,18.9 42.4,19.1 v42.4,22.8 42.4,26.2 | v34.1,23 34.1,21.6 33.6,21.1
  Bottom 0.3: v32.6,8.7 33.2,9.3 v33.2,15.2 33.2,15.39 | v32.6,7.5 32.6,6.8 v31.8,6 | v19.8,21.1 19.9,21.1 20.4,21.6 22.3,21.6 v22.5,21.4 | v16.7,19.3 16.8,19.2 16.8,11.6 17.4,11 20.3,11 v21,10.3 | v28.6,14.7 26.2,14.7 v26,14.9
  other vias: 18.4,23.2
ALERT  (via drill 0.15 pad 0.3)
  Top 0.15: U1.P$J24 v19.4,17 | U3.5 28.95,25.55 v28.6,25.9
  Route15 0.15: v19.4,17 19.4,17.2 19.7,17.5 19.7,19.2 20.2,19.7 20.2,21.2 20.8,21.8 25.1,21.8 25.1,22.8 v24.9,23
  Bottom 0.15: v24.9,23 25.8,23 26,23.2 26,25.3 26.3,25.6 26.9,25.6 27.1,25.8 27.1,26 27.3,26.2 28.3,26.2 v28.6,25.9
D+  (via drill 0.15)
  Top 0.15: v24.4,21.4 24.35,21.35 24.35,21.05 U1.P$AD6 | v31.6,27.9 31.75,28.05 D3.4
  Bottom 0.15: v31.6,27.9 23.7,27.9 23.3,27.5 23.3,23.2 24.4,22.1 v24.4,21.4
D-  (via drill 0.15)
  Top 0.15: U1.P$AD4 24.95,21.75 25.1,21.9 25.9,21.9 26.1,21.7 26.1,21.4 v26.2,21.4 | v33.6,30.7 33.55,30.65 D3.6
  Bottom 0.15: v26.2,21.4 26.5,21.4 27.1,22 32.9,22 33.7,22.8 33.7,30.6 v33.6,30.7
DEC1
  Top 0.15: C5.1 26.1,15.3 U1.P$C1
DEC3  (via drill 0.15 pad 0.3)
  Top 0.15: C11.2 v19.2,12
  Bottom 0.15: U1.P$D23 19.95,12.75 v19.2,12
  other vias: 19.95,15.7
DEC4_6  (via drill 0.15)
  Top 0.15: C10.2 15.7,19.41 15.5,19.2 15.5,17.8 | 15.5,17.8 15.9,17.4 17.8,17.4 C16.1 18.09,17.25 C15.1 18.85,16.8 19.45,16.2 U1.P$E24 | U1.P$B5 25,14.65 25,14.4 L3.2 24.11,14.11 23.8,13.8 v23.6,13.8 | 15.5,17.8 15.5,11.8 v15.6,11.7
  Bottom 0.15: v15.6,11.7 17.7,9.6 23.7,9.6 23.9,9.8 23.9,13.5 v23.6,13.8
DN  (via drill 0.35)
  Top 0.15: D3.1 28.95,30.95 v27.8,30.95 27.75,30.95 | J4.B7 23.75,29.45 23.85,29.55 23.85,30.45 23.6,30.7 23.5,30.7 | 23.5,30.7 23,30.7 22.75,30.45 J4.A7 | v24,31.2 23.5,30.7 | v25,33.5 24.3,33.5 v24.2,33.6
  Bottom 0.15: v25,33.5 27.55,30.95 v27.8,30.95 | v24.2,33.6 24.2,31.4 v24,31.2
DP  (via drill 0.35)
  Top 0.15: D3.3 28.55,28.75 28.3,29 v28.3,30.2 | v23.3,34.3 24.7,34.3 24.95,34.05 v25.85,34.05 | v23.3,34.3 22.6,33.6 v22.3,33.6 22.25,33.55 | v22.2,30.3 22.2,29.02 J4.B6 | v23.3,34.3 v23.3,33.6 | v23.3,30.2 23.3,29.02 J4.A6
  Bottom 0.15: 28.4,30.1 v28.3,30.2 28.3,31.2 26.05,33.55 25.95,33.65 v25.85,34.05 | 23.2,34.2 v23.3,34.3 | v23.3,33.6 v23.3,30.2 | v22.2,30.3 22.2,33.5 v22.3,33.6
EPD_3V3  (via drill 0.15, 0.15 pad 0.3)
  Top 0.3: 2.1,31.85 C1-EP-DR.1 2.45,31.75 2.55,31.85 v2.85,31.85 | Q1.3 36.1,24.4 v34.8,23.1 | v8,26.4 8,27.3 7.8,27.5 L5.2 5.89,27.7 4.9,28.69 v4.9,31.1 | J1.16 J1.15 10.68,16.3 v11.2,16.3 | EPD_C5.2 v14,16.2
  Route15 0.3: v8.1,15.7 8,15.6 v8,8.2 | v2.85,31.85 4.35,31.85 4.9,31.3 v4.9,31.1
  Bottom 0.3: v34.8,23.1 34.8,10 32.8,8 8.2,8 v8,8.2 | v8,26.4 8,15.8 v8.1,15.7 8.25,15.85 11.65,15.85 | 11.65,15.85 13.7,15.85 14,16.15 v14,16.2 | v11.2,16.3 11.65,15.85
EPD_BUSY  (via drill 0.15)
  Top 0.15: U1.P$AD12 22.95,21.45 22.6,21.8 20,21.8 19.8,21.6 v19.7,21.6 | v9.9,19.5 10.15,19.25 J1.9
  Route15 0.15: v17.3,21.6 17,21.6 16,20.6 9.9,20.6 v9.9,19.5
  Bottom 0.15: v19.7,21.6 v17.3,21.6
EPD_CS  (via drill 0.15, 0.15 pad 0.3)
  Top 0.15: v15.9,8.9 15.1,9.7 9,9.7 8.7,10 8.7,11.3 v8.5,11.5 | J1.12 10.57,17.7 v9.9,17.7 | U1.P$K2 25.55,17.1 v25.6,17.1
  Route15 0.15: v8.5,11.5 8.5,17.4 8.8,17.7 v9.9,17.7
  Bottom 0.15: 25.55,17.1 v25.6,17.1 25.6,9.2 25.3,8.9 v15.9,8.9
EPD_DC  (via drill 0.15)
  Top 0.15: U1.P$AD10 23.45,21.35 22.9,21.9 v22.9,22.2 | v9.9,18.3 10.57,18.3 J1.11
  Bottom 0.15: v22.9,22.2 22.7,22.2 22.4,22.5 16.3,22.5 15,23.8 11.4,23.8 9.1,21.5 9.1,18.6 9.4,18.3 v9.9,18.3
EPD_RST  (via drill 0.15 pad 0.3)
  Top 0.15: J1.10 10.68,18.8 11,18.8 11.2,19 11.2,20.4 11.6,20.8 13.1,20.8 13.3,21 13.3,22.1 13.5,22.3 14.8,22.3 15,22.5 v15.1,22.5 | U1.P$AC11 v23.2,20.65
  Bottom 0.15: v15.1,22.5 15.6,22 22.45,22 23.2,21.25 v23.2,20.65
GDR
  Top 0.15: R2_EP_DR.2 3.32,32.48 Q3.1 4.85,32.45 5.1,32.7 5.9,32.7 6.2,32.4 6.2,30.5 6.5,30.2 8.1,30.2 8.5,29.8 8.5,25.6 10,24.1 10,22.9 10.15,22.75 J1.2
GND  (via drill 0.15)
  Top 0.15: IC3.8 IC3.9 28.85,21.65 28.9,21.6 v29,21.6 | C6.2 19.85,12.75 C12.2 C19.2 C8.1 C7.2 19.2,10.9 18.3,10.9 18.09,11.11 C11.1 C1.2 | C1.2 C2.2 | C1.2 C3.1 16.7,12.3 17.1,11.9 v17.4,11.9 | X1.4 16.95,15.1 17.2,15.1 17.98,14.32 X1.2 | X1.4 16.57,16.27 16.9,16.6 17.25,16.6 C15.2 17.45,16.75 v18,16.2 | C14.2 18.7,19.55 C9.1 18.7,17.8 | 18.7,17.8 C16.2 | 18.7,17.8 18.3,18.2 16.3,18.2 16,18.5 C10.1 17,17.8 v17.3,17.8 | v16.3,17 16.57,16.73 X1.4 | U1.P$F23 v19.9,16.2 | C17.1 28.2,10.9 28.4,10.7 31.2,10.7 31.41,10.91 C18.1 v32,11.6 | C13.2 21.8,13 21.4,13 v21.3,12.9 | C34.2 33.99,16.8 34,16.8 v34.1,16.8 | J2.3 J2.5 40.9,12.75 v40.9,12.7 | TP_GND.TP 38.4,24.9 TP_BAT_GND.TP v39.4,28.2 | J4.SH1 27.32,33.66 R1_USB.1 28.53,32.51 C42.2 v30.5,33.1 | D3.2 v30.2,29.7 | J4.A1_B12 26.75,28.98 J4.SH3 26.8,30.07 v26.8,30.9 | J4.SH2 18.78,33.8 v20,33.8 | J4.A12_B1 19.25,28.98 J4.SH4 18.68,31.18 v18.7,31.2 | R2_USB.2 21.7,31.38 v21.7,31.9 | IC1.D2 22.25,23.8 C24.1 | C24.1 22.35,24.15 v22.4,24.1 | v19.7,27.1 19.65,27.05 C25.2 | C33.2 21.6,26.25 v21.6,25.5 21.8,25.3 23.52,25.3 R9.1 | IC2.B1 IC2.C1 IC2.C2 IC2.C3 19.2,23.1 18.8,22.7 18,22.7 v17.5,23.2 | C23.1 21.05,24.15 C24.1 | EPD_C1.1 12.2,24.6 v11.3,24.6 | EPD_C2.1 v14.9,23.1 | EPD_C9.1 12.3,21.4 11.7,21.4 v11.5,21.2 | J1.8 10.25,19.75 9.6,20.4 v9.6,20.8 | v11.6,19.7 12,20.1 EPD_C6.1 EPD_C7.1 | EPD_C8.1 EPD_C5.1 12.25,15.65 | 12.25,15.65 12.1,15.8 v12.1,16.3 | EPD_C10.1 v13.1,14 | EPD_C12.1 13.5,11.1 EPD_C11.1 12.1,12.3 v11.7,11.9 | J1.MP2 7.97,10.78 v7.5,10.3 | v7,6.8 6.9,6.9 C22.2 C4.1 v7,7.9 | C31.2 13.4,4.85 SW_ENT.1 13.57,4.1 v14.2,4.1 | C30.2 23.9,5.45 23.9,4.4 24.03,4.27 SW_UP.1 24.43,4.3 v25.2,4.3
  Top 0.15: C29.2 35.1,5.7 | 35.1,5.7 35.4,5.4 SW_DN.1 | 35.1,5.7 v35.7,5.7 | IC4.B1 29.5,17.5 29.5,18.45 C32.2 29.45,18.4 v29.1,18.4 | C20.2 27.25,19.95 v27.1,19.8 | 27.57,25.38 27.9,25.05 U3.6 29.75,25.05 29.9,24.9 | 27.57,25.38 C39.2 | C21.2 26.5,24.3 27.57,25.38 | C21.2 v26.5,23.4 | 29.9,24.9 U3.9 | U3.4 30.55,25.55 29.9,24.9 | U3.1 30.55,24.05 30,24.6 U3.9 | C27.2 U3.9 | C38.2 25.8,26.65 25.8,25 | 25.8,25 25.8,24.4 26.05,24.15 C21.2 | C43.2 28.7,27.45 v28.7,26.9 | C5.2 27.3,14.3 v27.2,14.2 | U1.P$B7 24.4,14.75 v24.4,14.6 | 22.7,16.5 U1.P$77 | 22.7,16.5 U1.P$74 U1.P$75 | 22.7,16.5 U1.P$76 | IC4.B3 v31.4,17.1 | C1-EP-DR.2 1.95,30.6 v1.4,30.6 | R2_EP_DR.1 4.27,33.7 v4.3,33.7 | D4.1 7.1,28.75 v7.1,29.5 | SJ1.1 6.8,31.84 v6.8,32.6 | J1.MP1 8.06,24.04 8.5,23.6 v8.6,23.6 | R_TYPE_SEL.1 9.82,32.67 9.8,32.7 v9.85,32.75 | C37.2 25.15,25.3 25.5,25.3 25.8,25 | R3.1 v28.4,19.7 | J1.17 10.95,15.25 11.3,14.9 11.5,14.9 12.25,15.65
  Route15 0.15: v17.3,17.8 17.1,17.8 v16.3,17
  Bottom 0.15: v19.9,16.2 v18,16.2
  pour Route2: -0.77,-0.82 46.52,-0.82 46.52,35.22 -0.62,35.22 -0.82,-0.77
  pour Top: -1.02,-0.82 46.72,-0.82 46.72,36.22 -1.02,36.52
  pour Bottom: -1.12,-0.52 46.92,-0.52 46.92,36.32 -1.02,36.32 -1.12,-0.4
HAPTIC_EN  (via drill 0.15 pad 0.3)
  Top 0.15: U1.P$U1 v26,18.9
  Route15 0.15: IC4.A1 29.8,17.7 27.2,17.7 v26,18.9
  other vias: 29.9,17.6
IMU_INT1  (via drill 0.15)
  Top 0.15: v27,18.4 26.55,17.95 U1.P$N1 | IC3.5 29.95,21.15 v30.4,20.7
  Route15 0.15: v27,18.4 27.4,18.8 30.2,18.8 30.4,19 v30.4,20.7
IMU_INT2  (via drill 0.15)
  Top 0.15: U1.P$P2 25.5,18.2 v25.5,18.1 | IC3.6 30.35,21.65 v30.5,21.5
  Route15 0.15: v31.5,18.8 31.5,20.8 31.9,21.2 31.9,21.3 31.6,21.6 30.6,21.6 v30.5,21.5
  Bottom 0.15: v25.5,18.1 25.6,18.2 26.3,18.2 26.9,18.8 v31.5,18.8
LX1  (via drill 0.15)
  Top 0.3: IC2.B3 IC2.B2 | v22.1,27.2 22.37,27.2 L7.1
  Bottom 0.3: IC2.B2 20.7,24.7 22,24.7 22.1,24.8 v22.1,27.2
  other vias: 19.6,23.6
LX2  (via drill 0.15)
  Top 0.3: IC2.D3 IC2.D2 | L7.2 24.33,26.1 v24.3,26.1
  Route15 0.3: IC2.D2 19.8,24.6 22.5,24.6 23,25.1 23,25.6 23.5,26.1 v24.3,26.1
  other vias: 18.8,23.6
MOSI  (via drill 0.15 pad 0.3)
  Top 0.15: J1.14 10.57,16.7 v9.9,16.7 | U1.P$B13 v22.7,14.9
  Route15 0.15: v9.9,16.7 9.9,11.2 11,10.1 v15.6,10.1 | v22.7,14.9 22.7,14.7 22.4,14.4 22.4,13.7 22.6,13.5 23.4,13.5 v24.3,12.6
  Bottom 0.15: v15.6,10.1 16.2,10.1 17.1,9.2 24.1,9.2 24.3,9.4 v24.3,12.6
N$1
  Top 0.15: U1.P$B24 19.55,14.85 19.55,14.65 C1.1 17.7,13.21 X1.1
N$3
  Top 0.15: C2.1 18.9,13.61 19.75,14.45 U1.P$A23 19.95,14.95 19.6,15.3 18.2,15.3 X1.3
N$4  (via drill 0.15 pad 0.3)
  Top 0.15: v17.3,13 16.91,13 C3.2 16.11,13.21 16.1,13.2 v16,13.2
  Top 0.3: v9.1,8.9 L1.1
  Route15 0.15: v9.1,8.9 15.4,8.9 16,9.5 v16,13.2
  Bottom 0.15: U1.P$H23 19.85,16.6 17.75,16.6 17.3,16.15 v17.3,13
  other vias: 19.95,16.7
N$5  (via drill 0.15)
  Top 0.15: 18.09,18.5 C9.2 17.4,18.7 v17.3,18.6 | U1.P$N24 19.35,17.95 v19.3,18
  Bottom 0.15: v19.3,18 17.7,18 17.3,18.4 v17.3,18.6
N$6
  Top 0.15: U1.P$A18 21.9,14 C13.1
N$7  (via drill 0.15)
  Top 0.15: IC2.D1 v18.8,24.6 | R4.2 v19.9,25.2
  Bottom 0.15: v18.8,24.6 19.4,25.2 v19.9,25.2
N$8
  Top 0.15: U1.P$B3 25.5,14.65 L2.1
N$9
  Top 0.15: L2.2 L3.1
N$10
  Top 0.15: C20.1 26.1,20.55 24.8,20.55 U1.P$AC5
N$11
  Top 0.15: EPD_C2.2 10.95,21.75 J1.4
N$12  (via drill 0.15)
  Top 0.15: v24.1,24.8 24.1,25.12 R9.2
  Route15 0.15: v24.1,24.8 23.3,24.6 IC1.D1
  other vias: 22.9,24.2
N$14
  Top 0.15: IC2.E1 18.2,24.2 R2.2
N$15
  Top 0.15: C32.1 30.65,17.85 IC4.A2
N$16
  Top 0.15: R_TYPE_SEL.2 10.38,31.2 | 10.38,31.2 R1_EP_DR.1 | SJ1.2 10.18,31.4 10.38,31.2
N$18
  Top 0.15: IC3.1 28.4,20.57 R3.2
N$19  (via drill 0.15 pad 0.3)
  Top 0.15: v10.5,29.9 10.5,28.75 D4.2 D2.1 | D2.1 | v7.7,32.8 7,33.5 C2-EP-DR.1
  Bottom 0.15: v10.5,29.9 10.5,31.5 9.2,32.8 v7.7,32.8
N$21  (via drill 0.15, 0.15 pad 0.3)
  Top 0.15: v5.4,31 5.4,31.75 Q3.3 5.4,31.85 v5.4,32.3 | 1.11,28.61 L5.1 1.11,28.51 v2.9,30.3 | v9,26.1 D5.2 | v5.8,33.2 5.4,33.6 C2-EP-DR.2
  Bottom 0.15: v2.9,30.3 3.3,30.7 5.3,30.7 5.3,30.9 v5.4,31 6.2,30.2 8.3,30.2 8.6,29.9 8.6,26.4 8.9,26.1 v9,26.1 | v5.8,33.2 5.8,32.3 v5.4,32.3
N$22
  Top 0.15: 13.9,24.5 EPD_C1.2 13.1,23.9 13.1,22.5 12.9,22.3 11.9,22.3 11.5,21.9 11.5,21.8 10.9,21.2 10.68,21.2 J1.5
N$23
  Top 0.15: R2_USB.1 21.6,30 21.25,29.65 J4.B5
N$28  (via drill 0.35)
  Top 0.15: R1_USB.2 28.38,31.8 v25.7,31.8 | v24.4,30.2 24.25,30.05 J4.A5
  Bottom 0.15: v25.7,31.8 24.4,30.5 v24.4,30.2
N$32  (via drill 0.15, 0.15 pad 0.3)
  Top 0.15: J1.18 10.15,14.75 9.5,15.4 9.5,18.5 v9.9,18.9 | EPD_C6.2 v13.1,19.3
  Bottom 0.15: v13.1,19.3 10.3,19.3 v9.9,18.9
N$33  (via drill 0.15)
  Top 0.15: EPD_C7.2 13.9,18.2 13.4,17.7 11.5,17.7 v11.4,17.6 | v11.4,16.9 11.6,16.7 11.6,15.5 v11.4,15.3 11.4,15.22 | v11.22,14.45 11.03,14.25 J1.19
  Bottom 0.15: 11.4,17.7 v11.4,17.6 v11.4,16.9 | v11.22,14.45 11.4,14.62 v11.4,15.3
N$34
  Top 0.15: EPD_C8.2 13.2,16.2 13.2,14.9 13,14.7 11.8,14.7 11.6,14.5 11.6,14.2 11.15,13.75 J1.20 10.68,13.7
N$37
  Top 0.15: EPD_C10.2 13.8,14 13,13.2 11.4,13.2 10.95,12.75 J1.22
N$38
  Top 0.15: J1.24 11.38,11 EPD_C12.2
OUT+
  Top 0.15: TP_OP.TP 36.2,20.1 36,20.1 34.6,18.7 33.5,18.7 32.4,17.6 IC4.A3
OUT-
  Top 0.15: TP_ON.TP 36.1,19.7 34.8,18.4 33.8,18.4 33.5,18.1 33.5,17.6 33.2,17.3 32.3,17.3 31.6,16.6 IC4.C3
P0.00/XL1  (via drill 0.15)
  Top 0.15: C17.2 28.8,12.95 X2.1 28.95,12.8 v29.6,12.8 | U1.P$D2 25.55,15.8 v28.5,15.8
  Bottom 0.15: v28.5,15.8 28.8,15.8 29.4,15.2 29.4,13 v29.6,12.8
P0.01/XL2  (via drill 0.15)
  Top 0.15: C18.2 30.8,12.95 X2.2 30.45,13.8 v29.9,13.8 | U1.P$F2 25.6,16.2 25.7,16.1 28.3,16.1 v28.6,16.4
  Bottom 0.15: v28.6,16.4 29.9,15.1 v29.9,13.8
P0.13  (via drill 0.15)
  Top 0.15: C30.1 21.8,5.8 21.5,5.5 21.5,4.37 | U1.P$AD8 23.95,21.95 v23.7,22.2 | v16.5,22.9 16.5,21.7 v16.4,21.6 | v21,5.5 21.3,5.8 C30.1 | R5.1 24.4,6.07 24.4,6.5 24.3,6.6 22.6,6.6 22.4,6.4 22.4,5.85 C30.1
  Top 0.3: 21.5,4.37 SW_UP.2
  Route15 0.15: v23.7,22.2 23.3,22.6 20.9,22.6 v20.5,23 | v18.3,10.5 18.3,5.9 18.5,5.7 20.8,5.7 v21,5.5
  Bottom 0.15: v20.5,23 20.3,22.8 16.6,22.8 v16.5,22.9 | v16.4,21.6 16.4,20 15.9,19.5 15.9,13.9 16.4,13.4 16.4,11.4 17.3,10.5 v18.3,10.5
P0.14  (via drill 0.15)
  Top 0.15: 10.5,4.37 10.5,5.5 10.7,5.7 C31.1 11.45,6.45 11.6,6.6 13.4,6.6 13.6,6.4 R8.1 18.68,5.97 v19.6,6.9 | U1.P$AC9 24.05,20.45 v24.2,20.6 | v27.9,19.9 27.7,19.9 27.4,19.6 27.4,18.6 v27.6,18.4 | v28.3,18.1 28.3,16.9 v28,16.6
  Top 0.3: 10.5,4.37 SW_ENT.2
  Route15 0.15: v28,16.6 28,14.9 27.6,14.5 27.6,7.4 27.1,6.9 v19.6,6.9
  Bottom 0.15: v24.2,20.6 27.2,20.6 v27.9,19.9 | v27.6,18.4 28,18.4 v28.3,18.1
P1.01  (via drill 0.15 pad 0.3)
  Top 0.15: U1.P$Y23 19.95,20.45 19.3,21.1 19.3,21.8 20.1,22.6 21.1,22.6 21.3,22.4 22.5,22.4 22.7,22.6 25.9,22.6 v26.1,22.4 | v33.3,24.4 33.6,24.7 R_PWR_EPD.1 33.62,25.27 Q1.1
  Route15 0.15: v26.1,22.4 27.2,23.5 32.8,23.5 33.3,24 v33.3,24.4
P1.02  (via drill 0.15 pad 0.3)
  Top 0.15: SW_DN.2 32.6,4.85 C29.1 33.17,5.97 R7.1 32.67,5.97 v33.1,6.4 | U1.P$W24 v19.5,19.5
  Route15 0.15: v19.5,19.5 18.8,18.8 18.8,6.8 19.2,6.4 v33.1,6.4
PMIC_INT  (via drill 0.15, 0.15 pad 0.3)
  Top 0.15: v25.6,23.5 26.7,22.4 26.7,19.9 v26.6,19.8 | 25.5,18.7 U1.P$T2 | IC1.A1 v24.3,24.4
  Bottom 0.15: v26.6,19.8 26.6,19 26.1,18.5 25.65,18.5 U1.P$T2 | v24.3,24.4 24.8,24.4 25.6,23.6 v25.6,23.5
  other vias: 25.45,18.7
PREVGH  (via drill 0.15)
  Top 0.15: D5.1 9.2,23.85 9.2,13.6 9.55,13.25 | 9.55,13.25 J1.21 | 9.55,13.25 9.55,10.25 9.5,10.2 9.7,10 14.4,10 14.8,10.4 v14.8,10.5 | v15.1,21.9 14.4,21.9 EPD_C9.2
  Bottom 0.15: 14.8,10.4 v14.8,10.5 14.8,21.6 v15.1,21.9
PREVGL
  Top 0.15: EPD_C11.2 14.4,12.5 14.4,12.4 | 14.4,12.4 14.8,12.4 14.8,20.9 15.6,21.7 15.6,23 14.9,23.7 14.9,25.3 14.7,25.5 11.7,25.5 11.4,25.8 11.4,27.2 11.6,27.4 D2.2 | 14.4,12.4 14.4,10.4 14.3,10.3 10.4,10.3 10,10.7 10,12.3 10.57,12.3 J1.23
RESE  (via drill 0.15, 0.15 pad 0.3)
  Top 0.15: v4.15,31.15 Q3.2 | J1.3 9.85,22.25 9.7,22.4 v9.7,22.7 | R1_EP_DR.2 9.82,30.52 9.8,30.5 v9.8,30.3
  Route15 0.15: v4.15,31.15 5,30.3 v9.8,30.3 9.9,30.3
  Bottom 0.15: 9.7,22.6 v9.7,22.7 9.7,30.2 v9.8,30.3
RESET  (via drill 0.15, 0.15 pad 0.3)
  Top 0.15: J2.6 40.7,13.82 40.7,14.8 | v38.5,14.6 39.3,15.4 40.5,15.4 40.7,15.2 40.7,14.8 | v36.8,17.8 34.3,17.8 v34.2,17.9 | TP_RESET.TP 44,18.1 40.7,14.8
  Bottom 0.15: v38.5,14.6 37.4,14.6 37,15 37,17.6 v36.8,17.8 | U1.P$AC13 22.95,20.2 27.2,20.2 27.5,19.9 27.5,19.6 28,19.1 31.2,19.1 31.3,19.2 34.1,19.2 34.2,19.1 v34.2,17.9
  other vias: 22.7,20.45
RF
  Top 0.15: ANT1.1 4.39,7.8 L1.2 5.5,8 C4.2 C22.1
SCK  (via drill 0.15 pad 0.3)
  Top 0.15: U1.P$A12 22.5,14 22.5,12.7 22.3,12.5 21.6,12.5 21.4,12.3 21.4,10 21.2,9.8 18,9.8 v17.8,10 | v9.9,17.2 9.95,17.25 J1.13
  Route15 0.15: v17.8,10 15.9,8.1 9.8,8.1 9.6,8.3 v9.6,8.5 | v9.6,9.3 9.3,9.6 9.3,16.9 9.6,17.2 v9.9,17.2
  Bottom 0.15: v9.6,8.5 v9.6,9.3
SCL  (via drill 0.15 pad 0.3, 0.35)
  Top 0.15: IC1.B1 23.7,24.5 23.2,25 21.18,25 R4.1 20.98,25.27 21.2,25.5 21.2,27.3 20.7,27.8 17.5,27.8 17.3,28 17.3,32.2 17.6,32.5 v20.2,32.5 | TP_SCL.TP 41.88,26.82 R17.2 41.7,26.82 | 29.8,19.7 28.7,18.6 28.7,17 29.1,16.6 IC4.C1 | U3.7 28.35,24.55 28.1,24.3 28.1,23.2 30,23.2 30.9,22.3 30.9,20.7 29.8,19.6 29.8,19.7 | U1.P$M2 25.5,17.7 v25.5,17.6 | IC4.C1 29.6,16.6 v29.1,17.1 | IC3.12 28.52,21.15 28.57,21.2 v28.7,21.2 | 29.8,19.7 v29.8,20.1 | IC4.C1 29.9,15 30.1,14.8 36,14.8 39.9,18.7 39.9,26.82 41.7,26.82 | v41,27.7 41,27.52 41.7,26.82
  Route15 0.15: v28.7,21.2 29.3,20.6 29.8,20.6 v29.8,20.1 | v20.2,32.5 33.2,32.5 34.8,30.9 40.3,30.9 41,30.2 v41,27.7
  Bottom 0.15: v25.5,17.6 25.6,17.5 28.7,17.5 v29.1,17.1
SDA  (via drill 0.15, 0.15 pad 0.3, 0.35)
  Top 0.15: 44.6,22.3 TP_SDA.TP 43.92,22.2 43.9,22.23 R18.2 42.92,22.23 v41.8,21.1 | 31.7,21.1 31.7,22.6 30.8,23.5 30.1,23.5 30,23.6 30,23.8 29.9,23.9 29.16,23.9 U3.8 28.65,24.05 v28.5,23.9 | U1.P$L1 27.15,17.45 28.85,19.15 IC3.2 28.85,20.82 29.23,21.2 v29.4,21.2 | 31.7,21.1 31.9,20.9 v31.9,18 34.5,20.6 v36.1,20.6 | 31.7,21.1 31.6,21.2 v31.3,21.2 | v17.4,25.7 17.82,25.27 R2.1 18.93,25.27 19.5,24.7 22.9,24.7 23.3,24.3 IC1.C1
  Top 0.3: 29.21,24.05 U3.8
  Route15 0.15: v36.1,20.6 36.6,21.1 v41.8,21.1 | v17.4,25.7 17.5,25.8 17.5,27.2 18.4,28.1 27.6,28.1 28.1,27.6 28.1,24.3 v28.5,23.9
  Bottom 0.15: v31.9,18 31.3,18 IC4.B2 | v31.3,21.2 31.2,21.1 29.5,21.1 v29.4,21.2
  other vias: 30.4,17.1
SWDCLK
  Top 0.15: J2.4 39.2,11.05 39.2,11 36.7,11 36.6,11.1 | 36.6,11.1 36.6,14.2 37.3,14.9 38.3,14.9 39.1,15.7 40.7,15.7 41.2,16.2 TP_SWDCLK.TP | 36.6,11.1 34.8,9.3 17.4,9.3 15.2,11.5 15.2,19.5 15.9,20.2 19.2,20.2 U1.P$AA24
SWDIO  (via drill 0.15, 0.15 pad 0.3)
  Top 0.15: J2.2 40.16,10.37 39.8,10 39.8,7.7 38.9,6.8 v35.5,6.8 | TP_SWDIO.TP 37.1,28.4 37.1,23.9 36.8,23.6 v36.8,22.7 | 35.4,6.8 v35.5,6.8 | U1.P$AC24 19.35,20.55 17.75,20.55 17.2,21.1 v15.8,21.1 | v15.5,8.5 30.7,8.5 32.4,6.8 v35.5,6.8
  Bottom 0.15: v15.8,21.1 15.2,20.5 15.2,8.8 v15.5,8.5 | v36.8,22.7 36.8,19.3 38.9,17.2 38.9,14.5 38.6,14.2 37,14.2 36.7,13.9 36.7,8 v35.5,6.8
SWO  (via drill 0.15, 0.15 pad 0.3)
  Top 0.15: TP_SWO.TP 32.5,26.3 32.5,24.1 32.3,23.9 v32.3,20.5 | v27.2,21.4 27.4,21.4 27.9,20.9 v27.9,20.4 | v20.6,21.1 U1.P$AD22
  Route15 0.15: v27.2,21.4 27.1,21.4 26.7,21 20.7,21 v20.6,21.1
  Bottom 0.15: v32.3,20.5 31.3,19.5 29.1,19.5 28.2,20.4 v27.9,20.4
VBAT  (via drill 0.15)
  Top 0.3: IC1.C2 23.3,23.1 23.4,23 24.1,23 24.8,23.7 C37.1 25.4,24.45 v25.4,24.9 | 30.7,26.5 31.8,26.5 | 31.8,26.5 32.1,26.2 32.1,25 31.65,24.55 U3.2 U3.3 | TP_VBAT.TP 33.2,29.5 33.2,27.9 31.8,26.5 | 30.7,26.5 C27.1 | v27.7,26.6 27.9,26.4 29,26.4 29.4,26.8 29.4,27.3 29.7,27.6 30.5,27.6 30.7,27.39 30.7,26.5
  Route15 0.3: v25.4,24.9 26.1,25.6 26.9,25.6 27.3,26 27.3,26.3 27.6,26.6 v27.7,26.6
VBUS  (via drill 0.15, 0.15 pad 0.3)
  Top 0.3: 20.6,29.48 J4.A9_B4 20.6,29.5 21.1,30 21.1,32.7 21.4,33 24.8,33 25.1,32.7 25.1,29.77 25.4,29.48 J4.A4_B9 25.4,28.5 25.8,28.1 | 25.8,28.1 27.2,28.1 27.55,27.75 C43.1 | C43.1 27.55,27.3 C38.1 C21.1 | C43.1 28.15,28.1 30.2,28.1 30.6,28.5 30.6,29.2 31.1,29.7 D3.5 31,29.7 30.7,30 30.7,30.6 30.5,30.8 C42.1 | v25.5,21.4 25.45,21.35 U1.P$AD2 | IC1.A2 v24.2,23.8 | v23.9,27.3 23.9,27.9 24.1,28.1 25.8,28.1
  Route15 0.3: 24.7,23.8 25.5,23 v25.5,21.4 | v24.2,23.8 24.7,23.8 | 24.7,23.8 24.9,24 24.9,27.2 24.5,27.6 24,27.6 23.9,27.5 v23.9,27.3
VREG  (via drill 0.15, 0.15 pad 0.3, 0.35)
  Top 0.3: C39.1 27.5,23.2 v27.6,23.1 | TP_VREG.TP 36.9,33.6 33.1,33.6 v32.8,33.3 | IC2.A1 IC2.A2 IC2.A3 20.3,23.5 C23.2 21.45,23.05 C24.2 22.65,23.05 v22.7,23
  Route15 0.3: IC1.B2 23.7,23.6 23.1,23 v22.7,23
  Bottom 0.3: IC1.B2 23.7,23.3 25.1,21.9 26.4,21.9 v27.6,23.1 27.7,23.2 32.3,23.2 32.8,23.7 v32.8,33.3
  other vias: 23.7,23.8
(copper drawn outside any net)
  shapes: Bottom area x1, Route2 area x1